# Altium PCB UDEMY_ALI_ALCAN.PcbDoc (part 3 of 3)
Units mm, origin at the board's own origin, x right, y up, seen from the top; angles counter-clockwise.
Board outline 102 x 100 mm, 4 copper layers (Top Layer, GROUND, POWER, Bottom Layer), stack 1.369 mm thick; 127 components, 90 nets, 438 pads, 96 vias.
Unrouted connection lines stored in the file: 1.
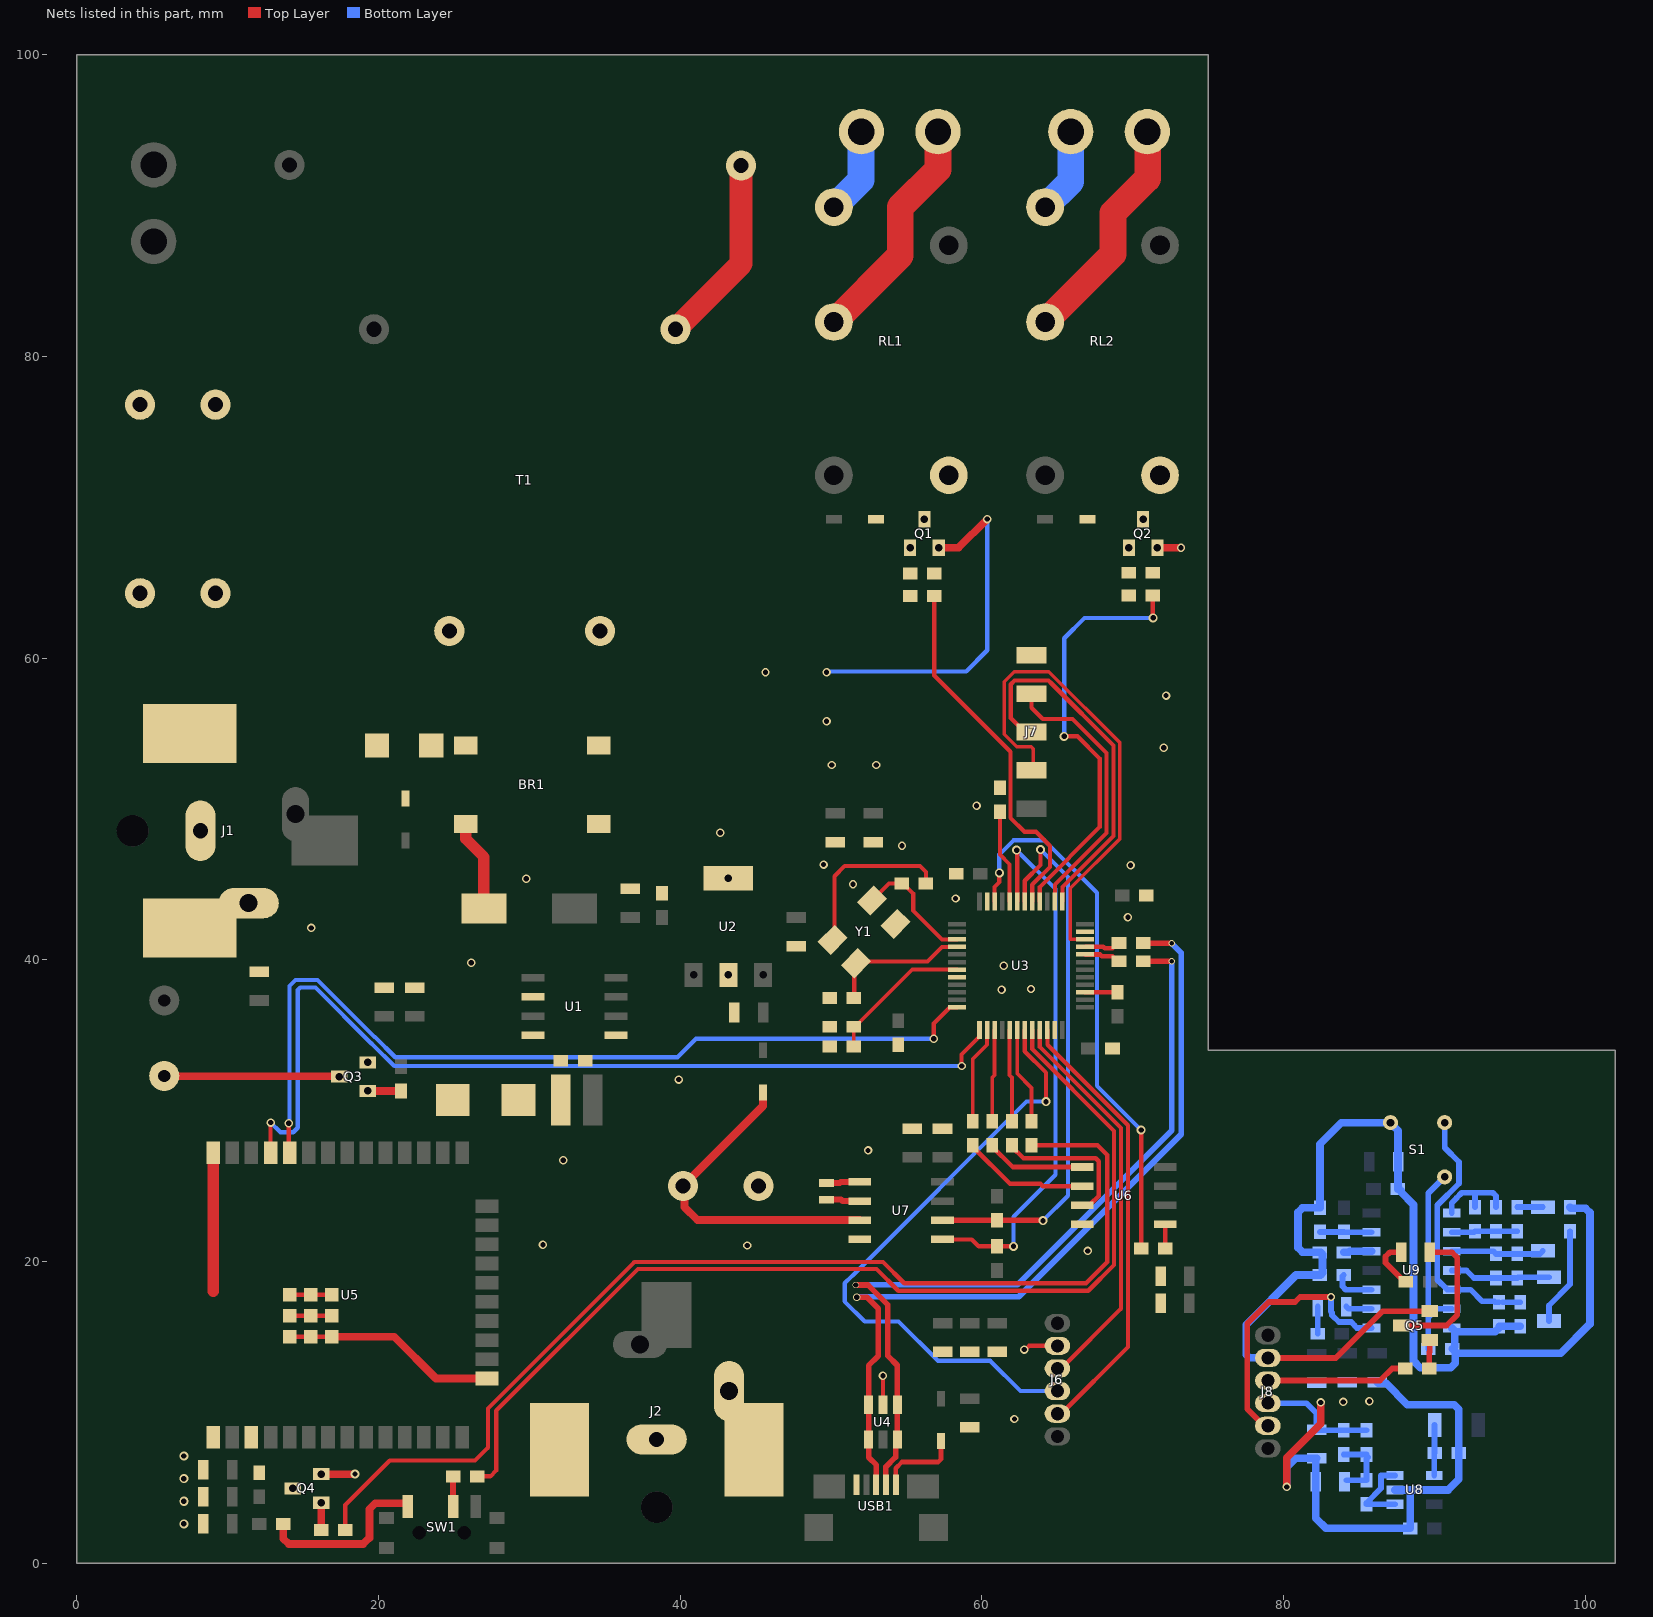
[diagram p4: the nets of this part, all layers, seen from the top]

## Via types
v1: diameter 0.559, hole 0.35, Top Layer to Bottom Layer, 48 vias
v2: diameter 0.6, hole 0.35, Top Layer to Bottom Layer, 42 vias
v3: diameter 0.45, hole 0.3, Top Layer to Bottom Layer, 2 vias
v4: diameter 0.5, hole 0.35, Top Layer to Bottom Layer, 1 vias
v5: diameter 0.4, hole 0.35, Top Layer to Bottom Layer, 1 vias
v6: diameter 0.5, hole 0.3, Top Layer to Bottom Layer, tented both sides, 1 vias
v7: diameter 0.35, hole 0.35, Top Layer to Bottom Layer, 1 vias

## Nets (pads, with @x,y where several pads share a name; then routed paths per layer and width w, separated by ;. In a path a pad name is that pad's centre, name@x,y a point inside that pad or via, vN(x,y) a via of type N, cw(c..) or ccw(c..) an arc to the next point about the centre after c; other vN are vias at no path point) (continued)
GND: BR1.4 C1.@22.4,38.15 C2.@20.4,38.15 C3.@36.7,44.7 C4.1 C6.@47.7,40.9 C7.@43.6,36.5 C8.2 C9.2 C10.2 C11.@59.2,9 C12.@57.416,14.004 C13.@59.216,14.004 C14.@61.016,14.004 C15.1 C17.1 C18.@12.1,39.2 C19.@8.4,2.6 C20.@8.4,4.4 C21.@8.4,6.2 C22.2 C23.@71.862,17.222 C24.@55.4,28.8 C25.@71.862,19.022 C26.@57.4,28.8 C27.@50.3,47.8 C28.@52.8,47.8 C29.1 C30.1 C31.1 C32.1 D1.A J1.2 J1.3 J2.2 J2.3 J6.2 J7.5 Q1.2 Q2.2 Q3.2 Q4.2 R3.1 R5.1 R6.1 R8.1 U1.6 U2.2 U3.8 U3.23 U3.35 U3.47 U4.2 U5.1 U5.15 U5.38 U5.39 U6.4 U7.4 USB1.5 Y1.2 | length 67.1
  Top Layer w0.279: U4.2@53.45,10.5 v1(53.45,12.414) ; v1(62.816,14.154) 62.891,14.154 63.142,14.404 J6.2@65.016,14.404 ; v1(73.211,67.31) v1@73.218,67.317
  Top Layer w0.305: U5.39@14.119,14.998 U5.39@15.519,14.998 U5.39@16.919,14.998 ; U5.39@14.119,16.398 U5.39@15.519,16.398 U5.39@16.919,16.398 ; U5.39@14.119,17.798 U5.39@15.519,17.798 U5.39@16.919,17.798 ; v2(18.453,5.9) v2@18.455,5.901
  Top Layer w0.5: Q1.2@57.15,67.31 58.458,67.31 v1(60.365,69.217) ; Q2.2@71.65,67.31 v1(73.211,67.31)
  Top Layer w0.508: Q4.2@16.2,5.9 v2(18.453,5.9) ; U5.39@16.919,14.998 21.061,14.998 23.819,12.24 U5.15@27.2,12.24
  Top Layer w0.762: 9.039,18.036 U5.38@9.039,27.198 ; BR1.4@25.8,48.99 25.8,48.009 27,46.809 C8.2@27,43.4
  Bottom Layer w0.279: v1(49.713,59.065) 49.766,59.118 58.968,59.118 60.365,60.515 v1(60.365,69.217)
  other v1: 62.166,9.552 67.028,20.695 44.461,21.055 30.908,21.105 32.258,26.707 52.463,27.357 39.91,32.058 61.315,38.01 63.266,38.06 61.465,39.61 26.157,39.81 15.554,42.111 69.692,42.814 58.265,44.061 51.463,45.011 29.808,45.361 69.868,46.262 49.512,46.312 54.714,47.562 42.661,48.412 59.655,50.214 50.063,52.913 53.004,52.912 72.068,54.064 49.713,55.814 72.218,57.514 45.662,59.065
  other v2: 7.1,2.6 7.1,4.1 7.1,5.6 7.1,7.1
GND_S: C33.@82.218,11.95 C34.@84.219,12 C35.@86.219,12 C39.1 C41.1 C42.@82.15,5.4 C43.1 C44.@82.2,6.95 C45.1 C46.1 C47.@87.6,26.6 J8.2 Q5.2 R24.1 R25.1 R29.1 R32.1 R33.1 S1.1 U8.2 U9.7 | length 122.2
  Top Layer w0.381: J8.2@78.97,13.603 83.47,13.603 86.568,16.7 Q5.2@89.7,16.7
  Top Layer w0.508: v1(80.22,5.051) 80.22,6.977 82.471,9.227 v1(82.471,10.653)
  Bottom Layer w0.508: J8.2@78.97,13.603 77.752,13.603 77.537,13.818 77.537,15.804 80.833,19.1 82.456,19.1 82.596,19.24 82.596,20.46 82.456,20.6 81.268,20.6 80.97,20.898 80.97,23.258 81.268,23.556 C45.1@82.421,23.556 82.421,27.776 83.845,29.2 S1.1@87.1,29.2 87.233,29.2 87.233,29.023 87.6,28.656 C46.1@87.6,24.834 ; v1(80.22,5.051) 80.22,6.352 80.819,6.95 C44.@82.2,6.95 82.15,6.9 C42.@82.15,5.4 82.15,2.971 82.821,2.3 C43.1@88.4,2.3 88.4,4.85 ; C35.@86.219,12 86.307,11.912 86.813,11.912 88.222,10.503 91.325,10.503 91.623,10.205 91.623,5.551 90.922,4.85 88.4,4.85 ; U8.2@87.4,4.85 88.4,4.85 ; C46.1@87.6,24.778 C46.1@87.6,24.807 ; C46.1@87.66,24.807 87.801,24.667 87.801,24.58 88.622,23.758 88.622,13.415 89.084,12.953 91.098,12.953 91.396,13.251 C39.1@91.396,14.004 ; U9.7@91.16,15.59 91.417,15.333 94.022,15.333 94.3,15.611 R29.1@94.3,15.7 C41.1@95.7,15.7 ; U9.7@91.369,15.305 91.369,14.34 91.229,14.2 C39.1@91.2,14.2 C39.1@91.396,14.004 ; R24.1@99,23.6 99.064,23.536 100.024,23.536 100.321,23.239 100.321,15.85 98.386,13.915 91.485,13.915 C39.1@91.396,14.004
  other v1: 83.966,10.683 85.7,10.722
LED_DRIVER: J6.3 U3.21 | length 26.6
  Top Layer w0.279: U3.21@63.85,35.35 63.85,34.222 69.232,28.841 69.232,16.869 65.266,12.904 J6.3@65.016,12.904
LED_S: J8.3 R35.1 | length 9.4
  Top Layer w0.381: J8.3@78.97,12.103 86.408,12.103 87.209,12.903 R35.1@88.072,12.903
LIGHT_1_GND: J4.2 RL1.3 | length 5.8
  Bottom Layer w1.778: RL1.3@50.2,89.9 52,91.7 52,94.88 J4.2@52.02,94.9
LIGHT_1_VCC: J4.1 RL1.2 | length 15.5
  Top Layer w1.778: RL1.2@50.2,82.28 54.6,86.68 54.6,89.9 57.1,92.4 J4.1@57.1,94.9
LIGHT_2_GND: J5.2 RL2.3 | length 5.7
  Bottom Layer w1.778: RL2.3@64.2,89.9 65.9,91.6 J5.2@65.9,94.9
LIGHT_2_VCC: J5.1 RL2.2 | length 15.4
  Top Layer w1.778: RL2.2@64.2,82.28 68.7,86.78 68.7,89.5 71,91.8 71,94.88 J5.1@70.98,94.9
MCU_N: R11.1 U3.32 | length 2.5
  Top Layer w0.305: U3.32@66.85,40.35 66.85,40.337 67.063,40.337 67.076,40.35 67.837,40.35 67.944,40.243 68.668,40.243 69.011,39.9 R11.1@69.1,39.9
MCU_P: R12.1 U3.33 | length 2.4
  Top Layer w0.305: U3.33@66.863,40.863 68.05,40.863 68.157,40.757 68.668,40.757 69.011,41.1 R12.1@69.1,41.1
NetBR1_1: BR1.1 T1.9
NetBR1_2: BR1.2 T1.7
NetBR1_3: BR1.3 F1.1
NetBZ1_1: BZ1.1 Q3.3 | length 11.6
  Top Layer w0.508: BZ1.1@5.8,32.3 5.825,32.275 17.385,32.275 Q3.3@17.41,32.25
NetC5_1: C5.1 U1.1
NetC5_2: C5.2 D1.C L1.1 U1.8
NetC9_1: C9.1 C10.1 D2.2 F1.2
NetC16_1: C16.1 Y1.4 | length 11.5
  Top Layer w0.279: Y1.4@50.114,41.319 50.238,41.443 50.238,45.537 50.913,46.212 55.914,46.212 56.3,45.826 C16.1@56.3,45.05
NetC16_2: C16.2 U3.3 Y1.3 | length 8.3
  Top Layer w0.279: Y1.3@52.73,43.936 53.844,45.05 C16.2@54.7,45.05 54.789,45.05 55.452,44.387 55.452,43.267 57.369,41.35 U3.3@58.35,41.35
NetC17_2: C17.2 U3.4 Y1.1 | length 9.5
  Top Layer w0.279: C17.2@51.513,37.459 51.546,37.492 51.546,39.64 Y1.1@51.67,39.764 51.793,39.887 56.406,39.887 57.369,40.85 U3.4@58.35,40.85
NetC22_1: C22.1 D6.1 U7.3 | length 21.8
  Top Layer w0.533: D6.1@45.5,31.2 45.5,30.3 C22.1@40.2,25 40.281,24.919 40.281,23.619 41.167,22.733 U7.3@51.9,22.733
NetC23: 
NetC36_1: C36.1 R24.2 | length 6.5
  Bottom Layer w0.381: C36.1@97.6,16.05 97.6,17.08 99,18.48 R24.2@99,22
NetC36_2: C36.2 C38.1 R23.1 U9.4 | length 6.7
  Bottom Layer w0.381: U9.4@91.16,19.4 92.131,19.4 92.631,18.9 C38.1@94.1,18.9 R23.1@95.5,18.9 95.55,18.95 C36.2@97.6,18.95
NetC37_1: C37.1 C38.2 R23.2 U9.3 | length 6.2
  Bottom Layer w0.381: U9.3@91.16,20.67 93.93,20.67 C38.2@94.1,20.5 97,20.5 C37.1@97.2,20.7
NetC37_2: C37.2 R26.1 | length 1.7
  Bottom Layer w0.381: R26.1@95.5,23.6 C37.2@97.2,23.6
NetC39_2: C39.2 S1.3 U9.6 | length 13.6
  Bottom Layer w0.381: C39.2@89.6,14.2 89.6,24.516 S1.3@90.692,25.608 ; 89.623,16.304 90.178,16.86 U9.6@91.16,16.86
NetC40_1: C40.1 R26.2 R27.1 U9.2 | length 4.4
  Bottom Layer w0.381: U9.2@91.16,21.94 92.64,21.94 C40.1@92.7,22 R27.1@94.1,22 R26.2@95.5,22
NetC40_2: C40.2 R27.2 U9.1 | length 5.7
  Bottom Layer w0.381: U9.1@91.16,23.21 91.16,23.881 91.473,24.194 91.473,24.206 91.823,24.556 92.608,24.556 ; C40.2@92.7,23.6 92.7,24.464 92.608,24.556 ; R27.2@94.1,23.6 94.1,24.333 93.877,24.556 92.608,24.556
NetC41_2: C41.2 R29.2 S1.2 U9.5 | length 17.3
  Bottom Layer w0.381: S1.2@90.692,29.2 90.692,27.532 91.637,26.588 91.637,25.16 90.202,23.725 90.202,18.788 90.86,18.13 U9.5@91.16,18.13 92.398,18.13 93.173,17.354 93.969,17.354 94.024,17.3 R29.2@94.3,17.3 ; R29.2@94.524,17.3 C41.2@95.7,17.3
NetC42: C42.@84.05,5.4 R28.2 R30.1 R31.1 | length 4.4
  Bottom Layer w0.381: R30.1@84,7.2 R31.1@85.5,7.2 ; C42.@84.177,5.5 R28.2@85.5,5.5 85.5,6.908 R31.1@85.61,7.018
NetC45_2: C45.2 R36.1 U9.13 | length 3.4
  Bottom Layer w0.381: C45.2@82.421,21.956 R36.1@84.021,21.956 84.037,21.94 U9.13@85.84,21.94
NetD3_2: D3.2 USB1.1 | length 5.6
  Top Layer w0.305: USB1.1@54.3,5.2 54.3,6.288 54.714,6.702 57.121,6.702 57.3,6.88 D3.2@57.3,8.1
NetD4_2: D4.2 Q1.3 RL1.4
NetD5_2: D5.2 Q2.3 RL2.4
NetD7_1: D7.1 U9.9 | length 1.7
  Bottom Layer w0.381: D7.1@84.171,17.004 84.315,16.86 U9.9@85.84,16.86
NetD7_2: D7.2 R34.1 | length 1.8
  Bottom Layer w0.381: R34.1@82.271,15.204 82.271,15.979 D7.2@82.271,17.004
NetD8_1: D8.1 Q5.3 | length 9.8
  Top Layer w0.381: Q5.3@87.81,15.75 90.819,15.75 91.523,16.454 91.523,20.255 91.178,20.6 D8.1@89.7,20.6
NetD8_2: D8.2 R37.1 | length 3.4
  Top Layer w0.381: D8.2@87.8,20.6 87.069,20.6 87.024,20.555 86.995,20.555 86.772,20.332 86.772,19.916 88.033,18.655 R37.1@88.122,18.655
NetJ6_5: J6.5 U3.22 | length 29.7
  Top Layer w0.279: U3.22@64.35,35.35 64.35,34.369 69.689,29.03 69.689,14.326 65.266,9.904 J6.5@65.016,9.904
NetJ8_5: J8.5 U9.8 | length 18
  Top Layer w0.381: J8.5@78.97,9.103 78.72,9.103 77.601,10.222 77.601,15.878 79.027,17.304 80.77,17.304 81.108,17.642 v1(83.154,17.642)
  Bottom Layer w0.381: v1(83.154,17.642) 83.154,16.672 83.226,16.6 83.226,16.428 83.678,15.976 84.496,15.976 84.722,15.75 84.722,15.737 84.869,15.59 U9.8@85.84,15.59
NetQ1_1: Q1.1 R2.2 R3.2
NetQ2_1: Q2.1 R4.2 R5.2
NetQ3_1: Q3.1 R7.2 | length 2.2
  Top Layer w0.508: Q3.1@19.3,31.3 20.725,31.3 R7.2@21.5,31.3
NetQ4_1: Q4.1 R14.2 | length 1.8
  Top Layer w0.508: R14.2@16.2,2.2 16.2,2.975 Q4.1@16.2,4
NetQ5_1: Q5.1 R35.2 | length 1.9
  Top Layer w0.381: R35.2@89.673,12.903 89.673,13.992 89.7,14.019 Q5.1@89.7,14.8
NetR1_2: R1.2 T1.1 | length 12.6
  Top Layer w1.524: T1.1@39.7,81.8 44.047,86.147 R1.2@44.047,92.649
NetR2_1: R2.1 U3.41 | length 24.4
  Top Layer w0.279: R2.1@56.85,64.11 56.85,58.85 61.911,53.789 61.911,49.41 62.838,48.483 63.59,48.483 64.517,47.556 64.517,46.145 63.35,44.978 U3.41@63.35,43.85
NetR4_1: R4.1 U3.40 | length 28.6
  Top Layer w0.279: U3.40@63.85,43.85 63.85,44.831 67.817,48.798 67.817,53.35 66.353,54.814 v2(65.466,54.814) ; v2@71.35,62.684 v2(71.368,62.666)
  Top Layer w0.3: v2@71.35,62.684 R4.1@71.35,64.155
  Bottom Layer w0.279: v2(65.466,54.814) 65.466,61.315 66.817,62.666 v2(71.368,62.666)
NetR8_2: R8.2 U3.44 | length 6.2
  Top Layer w0.254: R8.2@61.2,49.8 61.2,46.982 61.85,46.332 U3.44@61.85,43.85
NetR15_1: R15.1 U3.18 | length 6.4
  Top Layer w0.254: U3.18@62.35,35.35 62.35,32.452 63.3,31.502 R15.1@63.3,29.3
NetR16_1: R16.1 U3.27 | length 2.1
  Top Layer w0.279: U3.27@66.85,37.85 R16.1@69,37.85
NetR17_2: R17.2 SW1.2 | length 2
  Top Layer w0.279: R17.2@24.95,5.745 R17.2@24.956,5.751
  Top Layer w0.4: SW1.2@24.95,3.75 R17.2@24.95,5.745
NetR18_1: R18.1 U6.1 | length 6.6
  Top Layer w0.305: R18.1@60.7,27.7 60.7,27.611 62.05,26.261 U6.1@66.667,26.261
NetR19_1: R19.1 U6.3 | length 9.9
  Top Layer w0.305: R19.1@62,27.7 62,27.611 62.77,26.841 67.554,26.841 67.748,26.648 67.748,24.337 67.265,23.854 67.265,23.819 67.167,23.721 U6.3@66.667,23.721
NetR20_1: R20.1 U6.2 | length 8.4
  Top Layer w0.305: R20.1@59.4,27.7 59.4,27.611 61.871,25.14 63.896,25.14 64.045,24.991 U6.2@66.667,24.991
NetR21_1: R21.1 U6.5 | length 1.6
  Top Layer w0.279: R21.1@72.168,20.855 72.168,21.82 U6.5@72.167,22.451
NetR22_1: R22.1 SW1.1 | length 11.8
  Top Layer w0.508: R22.1@13.7,2.6 13.7,1.623 14.054,1.269 19.005,1.269 19.404,1.668 19.404,3.569 19.804,3.969 21.854,3.969 21.95,3.873 SW1.1@21.95,3.75
NetR25_2: R25.2 RT1.1 U8.4 | length 3.3
  Bottom Layer w0.381: U8.4@90,5.8 R25.2@90,7.279 ; R25.2@90.023,7.302 RT1.1@90.023,9.152
NetR28_1: R28.1 U8.1 U8.3 | length 5.1
  Bottom Layer w0.381: U8.1@87.4,3.9 86.469,3.9 R28.1@85.5,3.9 85.5,3.989 86.469,4.958 86.469,5.8 U8.3@87.4,5.8
NetR32_2: R32.2 U9.12 | length 1.9
  Bottom Layer w0.508: R32.2@84,20.6 84.321,20.6 84.391,20.67 U9.12@85.84,20.67
NetR33_2: R33.2 U9.10 | length 2.8
  Bottom Layer w0.381: R33.2@84,19.1 83.911,19.011 83.911,18.35 84.134,18.126 U9.10@85.84,18.126
NetU7_1: U7.1 Y2.2 | length 2.2
  Top Layer w0.381: Y2.2@49.7,25.2 50.581,25.2 50.654,25.273 U7.1@51.9,25.273
NetU7_2: U7.2 Y2.1 | length 2.2
  Top Layer w0.381: Y2.1@49.7,24.1 50.672,24.1 50.769,24.003 U7.2@51.9,24.003
NRST: C15.2 R6.2 U3.7 | length 9.6
  Top Layer w0.254: C15.2@51.513,34.259 R6.2@51.513,35.559 ; R6.2@51.602,35.559 55.393,39.35 U3.7@58.35,39.35
RTC_SCL: R9.1 U3.42 U7.6 | length 36.6
  Top Layer w0.279: U3.42@62.85,43.85 62.85,45.237 63.9,46.287 v2(63.9,47.3)
  Top Layer w0.381: U7.6@57.4,22.733 v2@64.039,22.733
  Bottom Layer w0.279: v2(63.9,47.3) 65.717,45.483 65.717,24.356 v2(64.066,22.706)
RTC_SDA: R10.1 U3.43 U7.5 | length 36.8
  Top Layer w0.279: U7.5@57.4,21.463 59.337,21.463 59.8,21 R10.1@61,21 v2(62.1,21) ; v2(62.316,47.262) 62.35,47.228 U3.43@62.35,43.85 U3.43@62.355,43.855
  Bottom Layer w0.279: v2(62.1,21) 62.1,22.963 64.884,25.747 64.884,44.694 v2(62.316,47.262)
SENSOR_ONOFF: R17.1 U3.20 | length 69.4
  Top Layer w0.279: R17.1@26.557,5.751 27.42,5.751 27.807,6.138 27.807,10.103 37.209,19.505 53.013,19.505 54.464,18.055 67.063,18.055 68.774,19.766 68.774,28.651 63.35,34.076 U3.20@63.35,35.35
SWCLK: J7.3 U3.37 | length 24.4
  Top Layer w0.279: J7.3@63.3,55.1 62.85,55.1 61.919,56.031 61.919,58.258 61.994,58.333 62.168,58.508 64.432,58.508 64.606,58.333 68.731,54.208 68.731,48.212 65.35,44.831 U3.37@65.35,43.85
SWDIO: J7.2 U3.34 | length 32.6
  Top Layer w0.229: J7.2@63.3,52.56 63.407,52.667 63.407,53.975 63.273,54.109 62.328,54.109 61.487,54.95 61.487,58.437 62.15,59.1 64.45,59.1 69.163,54.386 69.163,48.034 65.869,44.739 65.869,41.35 U3.34@66.85,41.35
TDI: J7.4 U3.38 | length 18.4
  Top Layer w0.279: J7.4@63.3,57.64 63.3,56.709 64.042,55.968 66.01,55.968 68.274,53.703 68.274,48.402 64.85,44.978 U3.38@64.85,43.85
TEMP_ADC: C44.@82.2,8.85 J8.4 R30.2 R31.2 | length 7.9
  Bottom Layer w0.381: J8.4@78.97,10.603 81.528,10.603 82.2,9.931 C44.@82.2,8.85 82.25,8.8 R30.2@84,8.8 R31.2@85.5,8.8
TEMP_IN_CS: R20.2 U3.14 | length 6.4
  Top Layer w0.254: R20.2@59.4,29.3 59.4,33.419 60.35,34.369 U3.14@60.35,35.35
TEMP_IN_OT: R21.2 U3.46 | length 36.4
  Top Layer w0.279: U3.46@60.85,43.85 60.85,44.831 61.165,45.146 v2(61.165,45.762) ; v2@70.518,28.757 v2(70.568,28.707) R21.2@70.568,20.855
  Bottom Layer w0.279: v2(61.165,45.762) 61.165,46.985 62.098,47.917 64.156,47.917 67.634,44.439 67.634,31.641 v2(70.568,28.707)
TEMP_IN_SCLK: R18.2 U3.15 | length 6.1
  Top Layer w0.254: R18.2@60.7,29.3 60.7,32.191 60.85,32.341 U3.15@60.85,35.35
TEMP_IN_SIO: R19.2 U3.17 | length 6.1
  Top Layer w0.254: U3.17@61.85,35.35 61.85,32.341 62,32.191 R19.2@62,29.3
TEMPARATURE_ADC: J6.4 U3.19 | length 41.4
  Top Layer w0.279: U3.19@62.85,35.35 62.85,33.929 64.266,32.513 v2(64.266,30.595)
  Bottom Layer w0.279: v2(64.266,30.595) 62.974,30.595 51.414,19.035 51.399,19.035 50.913,18.549 50.913,17.354 52.247,16.02 54.488,16.02 57.096,13.412 60.557,13.412 62.565,11.404 J6.4@65.016,11.404
USB_N: R11.2 U4.1 U4.6 USB1.2 | length 53.5
  Top Layer w0.373: v5(51.646,18.438) 52.461,18.438 53.764,17.136 53.764,13.753 54.4,13.117 U4.1@54.4,10.5 U4.6@54.4,8.2 54.287,8.087 54.287,7.025 53.639,6.377 53.639,5.211 USB1.2@53.65,5.2 ; R11.2@70.7,39.9 v3(72.6,39.9)
  Bottom Layer w0.373: v5@51.646,18.455 62.366,18.455 72.6,28.689 v3(72.6,39.9)
USB_P: R12.2 U4.3 U4.4 USB1.3 | length 54.7
  Top Layer w0.373: v4(51.708,17.628) 52.384,17.628 53.136,16.876 53.136,13.726 52.5,13.09 U4.3@52.5,10.5 U4.4@52.5,8.2 52.5,7.015 53.011,6.504 53.011,5.211 USB1.3@53,5.2 ; R12.2@70.7,41.1 v3@72.579,41.1
  Bottom Layer w0.373: v4(51.708,17.628) 51.735,17.654 62.453,17.654 73.227,28.429 73.227,40.458 v3@72.6,41.085
  other v3: 72.6,41.1
WIFI_EN: R14.1 R15.2 | length 73.9
  Top Layer w0.279: R14.1@17.8,2.2 17.8,3.846 20.755,6.802 26.407,6.802 27.257,7.652 27.257,10.253 36.966,19.962 53.456,19.962 54.864,18.555 66.917,18.555 68.317,19.955 68.317,27.057 67.674,27.7 R15.2@63.3,27.7
WIFI_OUT: Q4.3 R13.1 U5.3
WIFI_RXD: U3.12 U5.34 | length 59.6
  Top Layer w0.279: v1(14.057,29.157) 14.057,27.26 U5.34@14.119,27.198 ; v1(56.814,34.759) 56.814,35.764 57.9,36.85 U3.12@58.35,36.85
  Bottom Layer w0.279: v1(14.057,29.157) 14.104,29.204 14.104,38.26 14.504,38.66 15.967,38.66 19.744,34.883 19.771,34.883 21.115,33.538 39.831,33.538 41.052,34.759 v1(56.814,34.759)
WIFI_TXD: U3.13 U5.35 | length 62.5
  Top Layer w0.279: U5.35@12.849,27.198 12.849,29.203 v1(12.853,29.207) ; v1(58.665,32.958) 58.665,33.715 59.85,34.9 U3.13@59.85,35.35
  Bottom Layer w0.279: v1(12.853,29.207) 13.5,28.56 14.351,28.56 14.654,28.863 14.654,37.996 14.817,38.16 15.821,38.16 19.555,34.425 19.581,34.425 21.048,32.958 v1(58.665,32.958)
pads on no net: J1. J2. J6.6 J8.6 RL1.1 RL2.1 SW1. SW1.3 SW1.6 U1.2 U1.3 U1.5 U3.1 U3.2 U3.5 U3.6 U3.10 U3.11 U3.16 U3.25 U3.26 U3.28 U3.29 U3.30 U3.31 U3.39 U3.45 U5.4 U5.5 U5.6 U5.7 U5.8 U5.9 U5.10 U5.11 U5.12 U5.13 U5.14 U5.16 U5.17 U5.18 U5.19 U5.20 U5.21 U5.22 U5.23 U5.24 U5.25 U5.26 U5.27 U5.28 U5.29 U5.30 U5.31 U5.32 U5.33 U5.36 U5.37 U6.6 U6.7 U7.7 U9.11 USB1. USB1.4

## Polygon pours and split planes (outlines as drawn)
GND on Top Layer "GND_L01_P022" (solid, remove dead copper, pour order 22): 6.202,78.52 2.501,78.52 1.8,77.82 1.8,29.908 3.151,28.557 27.557,28.557 29.007,27.107 29.007,3.251 31.308,0.95 72.568,0.95 74.469,2.851 74.469,60.665 73.268,61.866 41.41,61.866 39.61,60.065 39.61,48.262 39.56,48.262 37.71,46.412 23.656,46.412 23.656,48.012 22.656,49.012 20.805,49.012 6.852,62.966 6.852,77.87
GND_S on Top Layer "GND_S_L01_P025" (solid, remove dead copper, pour order 25): 100.525,33.058 77.72,33.058 76.719,32.058 76.719,1.8 77.57,0.95 100.575,0.95 101.326,1.7 101.326,32.258
NetBR1_2 on Top Layer "NETBR1_2_L01_P000" (solid, pour order 0): 26.457,63.466 25.885,63.466 23.456,63.466 23.106,63.116 23.106,60.565 23.456,60.215 25.68,60.215 32.158,53.013 33.19,53.013 35.859,53.013 36.009,53.163 36.009,55.264 35.859,55.414 33.394,55.414
"5V DC" on Top Layer "Top Layer-5V DC" (solid, pour order 9): 37.88,41.996 39.696,40.181 39.696,37.981 39.896,37.781 41.796,37.781 41.996,37.981 41.996,42.476 41.168,43.303 35.625,43.318 35.309,43.572 35.309,44.667 34.98,44.996 31.206,44.996 31.006,44.796 31.006,42.096 31.206,41.896 33.506,39.396 34.706,38.096 37.106,38.096 37.406,37.796 37.406,32.796 37.006,32.396 33.596,32.396 33.406,32.206 33.406,29.059 33.57,28.896 34.906,28.896 37.806,28.896 38.406,29.496 38.406,37.854 36.296,40.081 35.243,41.133 35.243,41.569 35.606,41.996 36.106,41.996
GND on Top Layer "Top Layer-GND" (solid, pour order 21): 10.003,13.954 17.754,13.954 18.055,14.254 18.055,18.405 17.604,18.855 6.852,18.855 6.352,18.355 6.352,1.348 6.7,1 9.3,1 9.602,1.302 9.602,13.553
"3V3 DC" on Top Layer "3V3_DC_L01_P017" (solid, pour order 17): 44.911,33.008 46.112,33.008 46.462,33.358 46.462,41.51 47.212,42.261 48.312,42.261 48.612,42.561 48.612,48.262 49.062,48.712 56.838,48.712 59.165,46.385 59.165,45.261 59.565,44.861 59.565,43.085 59.668,42.982 59.982,42.982 60.115,43.115 60.115,44.861 60.565,45.311 60.565,47.585 57.487,50.663 46.662,50.663 46.362,50.363 46.362,44.961 44.561,43.161 44.561,33.358
NetC9_1 on Top Layer "NETC9_1_L01_P004" (solid, pour order 4): 10.9,65.9 10.9,77.972 10.372,78.5 8.4,78.5 7.982,78.5 7.4,77.918 7.4,77.5 7.4,63.5 7.4,63.218 8.118,62.5 8.4,62.5 10.9,62.5 15.42,62.5 18.4,59.52 18.4,55 18.4,52.7 18.7,52.4 20.218,52.4 20.5,52.118 20.5,49.768 20.755,49.512 22.706,49.512 23,49.807 23,52.269 22.669,52.6 21.819,52.6 21.5,52.919 21.5,55.3 21.5,55.7 21.5,60.171 16.371,65.3 11.5,65.3
NetBR1_1 on Top Layer "NETBR1_1_L01_P001" (solid, pour order 1): 33.542,63.55 33.1,63.108 33.1,60.674 33.574,60.2 36.374,60.2 36.597,59.978 36.597,50.55 36.346,50.3 33.62,50.3 33.2,49.918 33.2,48.045 33.538,47.8 38.198,47.8 38.5,48.102 38.5,62.9 38.5,63.126 38.076,63.55
GND_S on Bottom Layer "GND_S_L04_P024" (solid, remove dead copper, pour order 24): 77.47,33.108 100.275,33.108 101.276,32.108 101.276,1.85 100.425,1 77.42,1 76.669,1.75 76.669,32.308
GND on Bottom Layer "GND_L04_P023" (solid, pour order 23): 71.401,59.265 70.201,58.065 70.201,55.314 68.701,53.814 6.285,53.814 4.134,51.663 4.134,29.307 5.385,28.057 29.141,28.057 29.691,27.507 29.691,6.852 30.841,5.701 74.102,5.701 75.002,6.602 75.002,58.415 74.152,59.265 73.102,59.265 74.152,59.265 73.102,59.265
"3V3 DC" on POWER (split plane): 13.003,57.514 46.812,57.514 46.812,75.219 74.49,75.219 74.49,34 74.499,33.9 74.528,33.805 74.558,33.748 74.558,0.51 0.51,0.51 0.51,4.951 8.502,4.951 8.502,28.007 0.51,28.007 0.51,80.17 13.003,80.17
"12V DC" on POWER (split plane): 66.218,73.283 66.218,63.717 64.583,62.082 48.4,62.082 48.327,62.072 48.259,62.044 48.201,61.999 48.156,61.941 48.128,61.873 48.118,61.8 48.118,54.218 44.582,50.682 22.2,50.682 22.127,50.672 22.059,50.644 22.001,50.599 20.201,48.799 20.156,48.741 20.128,48.673 20.118,48.6 20.118,45.6 20.128,45.527 20.148,45.479 20.156,45.459 20.201,45.401 20.301,45.301 20.359,45.256 20.398,45.24 25.344,40.294 25.344,37.006 23.894,35.556 16.206,35.556 14.656,37.106 14.656,44.8 14.647,44.866 14.64,44.884 14.622,44.928 14.581,44.981 12.656,46.906 12.656,52.694 12.881,52.919 13.106,53.144 20.613,53.144 22.246,51.511 22.262,51.472 22.306,51.414 22.365,51.369 22.433,51.341 22.506,51.331 44.111,51.331 44.184,51.341 44.232,51.361 44.252,51.369 44.31,51.414 47.599,54.703 47.644,54.761 47.672,54.829 47.682,54.902 47.682,71.4 47.682,73.283 48.617,74.218 51.383,74.218 52.618,72.983 52.618,65.6 52.628,65.527 52.648,65.479 52.656,65.459 52.701,65.401 53.801,64.301 53.834,64.275 53.859,64.256 53.927,64.228 54,64.218 60.4,64.218 60.473,64.228 60.521,64.248 60.541,64.256 60.599,64.301 61.899,65.601 61.944,65.659 61.972,65.727 61.982,65.8 61.982,72.983 63.217,74.218 65.283,74.218
"3V3 DC_S" on POWER (split plane): 101.49,0.51 76.33,0.51 76.33,0.775 76.33,33.49 101.49,33.49
"5V DC" on POWER (split plane): 38.354,32.002 38.354,16.554 38.362,16.488 38.388,16.426 38.429,16.373 39.454,15.348 39.454,13.61 38.804,12.959 36.215,12.959 35.515,13.66 35.515,28.257 35.506,28.323 35.488,28.367 35.481,28.385 35.44,28.438 34.615,29.263 34.615,32.052 35.165,32.602 37.753,32.602
GND on GROUND (split plane): 13.003,58.165 44.611,58.165 44.611,75.219 74.49,75.219 74.49,34.055 74.482,33.959 74.482,0.51 0.51,0.51 0.51,8.152 8.102,8.152 8.102,28.007 0.51,28.007 0.51,80.17 13.003,80.17
GND_S on GROUND (split plane): 101.49,0.51 76.203,0.51 76.206,0.55 76.206,33.49 101.49,33.49

## Keep-outs
Top Layer:
  circle w0.254: c71.936,31.571 r1.5
Keep-Out Layer:
  the board outline again, w0.254

## Other copper
Top Layer:
  region: 72.046,32.254 71.846,32.254 ccw(c71.846,31.654) 71.246,31.654 ccw(c71.846,31.654) 71.846,31.054 72.046,31.054 ccw(c72.046,31.554) 72.546,31.554 72.546,31.754 ccw(c72.046,31.754)
  pour cut-out: 12.335,29.207 cw(c12.853,29.207) 12.853,29.725 13.012,29.725
  pour cut-out: 14.212,29.725 cw(c14.212,29.316) 14.622,29.316 14.622,29.157
  pour cut-out: 54.288,43.625 53.919,43.994 53.924,43.994 53.989,44.059 54.188,43.86 54.257,43.86 54.257,43.789 54.348,43.698
  pour cut-out: 53.989,44.059 53.687,44.361 53.912,44.587 53.965,44.534 54.039,44.534 54.039,44.478 54.829,44.478 55.078,44.229 55.078,43.258 55.024,43.258 54.961,43.195 54.41,43.747 54.302,43.747 54.348,43.701 54.348,43.698 54.361,43.698 54.41,43.747
  pour cut-out: 80.18,7.632 80.134,7.678 80.046,7.678 80.046,7.934 79.704,8.275 79.704,8.564 80.027,8.887 79.944,8.97 79.944,9.536 79.704,9.775 79.704,10.064 80.027,10.387 80.027,10.819 80.021,10.819 79.848,10.992 79.848,11.227 80.101,11.48 80.101,11.676 80.11,11.667 80.232,11.667 80.18,11.615
  pour cut-out: 86.408,11.676 86.756,11.676 87.412,12.332 87.369,12.375 87.285,12.375 86.618,11.708 86.441,11.708
  pour cut-out: 80.101,12.53 80.048,12.583 80.048,13.122 80.101,13.176 83.601,13.176 86.699,16.273 87.082,16.273 87.082,15.172 88.538,15.172 88.538,15.323 88.972,15.323 88.972,14.222 89.194,14.222 89.194,14.168 89.266,14.095 89.266,13.495 89.245,13.475 89.012,13.475 89.012,12.332 88.733,12.332 88.733,13.475 87.412,13.475 87.412,13.331 87.379,13.298 87.018,13.298 86.25,12.53
  region net LED_S: 78.07,12.754 79.87,12.754 79.92,12.704 79.92,11.504 79.87,11.454 78.07,11.454 78.02,11.504 78.02,12.704
  region net GND_S: 78.07,14.254 79.87,14.254 79.92,14.204 79.92,13.004 79.87,12.954 78.07,12.954 78.02,13.004 78.02,14.204
  region net "3V3 DC_S": 78.07,15.754 79.87,15.754 79.92,15.704 79.92,14.504 79.87,14.454 78.07,14.454 78.02,14.504 78.02,15.704
  pour cut-out: 14.622,29.157 14.495,29.03 14.495,28.557 14.626,28.557 14.622,28.562
  pour cut-out: 12.853,29.725 14.212,29.725 14.241,29.697 12.882,29.697
  pour cut-out: 12.335,29.207 12.335,28.562 12.341,28.557 12.473,28.557 12.473,28.861 12.375,28.96 12.375,29.406
  pour cut-out: 14.054,29.725 14.104,29.675 13.737,29.309 13.737,28.563 13.743,28.557 13.225,28.557 13.225,28.849 13.371,28.995 13.371,29.366 13.012,29.725
  pour cut-out: 32.7,28.519 33.497,28.519 33.501,28.515 33.501,28.784 33.225,29.059 33.229,29.063 33.229,32.285 33.344,32.4 33.335,32.41 33.335,32.509 33.153,32.69 33.139,32.676 33.01,32.676 33.01,32.654 32.981,32.626 32.981,28.744 32.769,28.533
  pour cut-out: 32.7,34.181 33.325,34.181 33.1,33.956 33.09,33.965 32.977,33.965 32.828,34.114 32.828,34.128 32.809,34.128 32.756,34.181
  pour cut-out: 29.019,35.3 29.019,35.375 29.145,35.501 29.096,35.55 29.096,35.619 28.767,35.619 28.757,35.609
  pour cut-out: 23.535,34.859 24.285,35.609 24.086,35.609 24.077,35.619
  pour cut-out: 24.366,34.728 24.441,34.653 24.606,34.653
  pour cut-out: 24.4,33.617 24.244,33.773 22.87,33.773 22.706,33.608
  pour cut-out: 24.4,34.694 24.366,34.728 22.635,34.728 22.409,34.502
  pour cut-out: 19.607,35.136 19.885,34.859 23.535,34.859 23.786,35.11
  pour cut-out: 67.611,23.651 67.937,23.651 67.94,23.648 67.942,23.651 67.942,23.815 67.873,23.815 67.824,23.864 67.595,23.635 67.595,23.627
  pour cut-out: 71.24,26.689 71.939,26.689 72.003,26.753 71.243,26.753 71.241,26.754 71.24,26.753
  pour cut-out: 72.167,25.769 72.103,25.833 71.24,25.833 71.24,25.771 71.237,25.769
  pour cut-out: 49.022,25.628 50.581,25.628 50.654,25.7 50.651,25.702 49.025,25.702 49.025,25.63
  pour cut-out: 49.022,25.628 50.378,25.628 50.45,25.7 49.012,25.7 49.012,25.699
  pour cut-out: 50.769,23.575 50.672,23.672 49.022,23.672 49.022,23.58 49.021,23.579 49.024,23.575
  pour cut-out: 51.9,22.228 52.825,22.228 52.828,22.225 52.828,22.305 52.151,22.305 52.113,22.266 51.938,22.266
  pour cut-out: 52.751,23.238 52.828,23.16 52.828,23.236 52.827,23.238
  pour cut-out: 51.9,23.238 52.055,23.238 52.04,23.223 52.04,23.21 51.928,23.21
  pour cut-out: 52.751,23.238 52.828,23.16 52.132,23.16 52.055,23.238
  pour cut-out: 52.23,4.347 54.872,4.347 54.872,4.276 54.878,4.271 52.154,4.271 54.878,4.271 52.154,4.271
  pour cut-out: 54.678,4.347 54.688,4.358 54.688,5.469 54.698,5.469 54.745,5.516 54.805,5.456 54.872,5.456 54.872,4.347
  pour cut-out: 54.688,5.469 54.698,5.469 54.745,5.516 54.805,5.456 54.872,5.456 54.872,4.542 54.682,4.351 54.688,4.358
  pour cut-out: 62.572,28.36 62.729,28.36 62.729,27.717 62.618,27.717 62.572,27.67
  pour cut-out: 61.272,28.36 61.428,28.36 61.429,28.36 61.429,27.717 61.318,27.717 61.272,27.67
  pour cut-out: 59.972,27.67 59.972,28.36 60.129,28.36 60.129,27.717 60.082,27.67
  pour cut-out: 62.363,31.761 62.431,31.761 62.48,31.809 62.937,31.352 62.937,29.961 62.729,29.961 62.729,28.64 62.572,28.64 62.572,29.961 62.363,29.961 62.363,31.761 62.411,31.809 62.48,31.809
  pour cut-out: 59.763,33.269 60.37,33.876 60.439,33.876 60.487,33.828 60.487,32.453 60.337,32.303 60.337,29.961 60.129,29.961 60.129,28.64 59.972,28.64 59.972,29.961 59.763,29.961
  pour cut-out: 67.231,45.59 67.217,45.576 67.217,44.903 67.488,44.632
  pour cut-out: 51.875,34.987 52.173,34.987 52.173,34.831 52.173,34.83 51.875,34.83
  pour cut-out: 50.852,34.987 51.15,34.987 51.15,34.83 50.852,34.83 50.852,34.987
  pour cut-out: 73.218,42.111 73.719,41.61 73.719,39.36 73.368,39.01 68.467,39.01 68.017,39.46 68.017,41.761 68.367,42.111 69.718,42.111
  region net GND: 70.668,65.166 70.818,65.016 72.218,65.016 72.368,65.166 72.368,67.967 72.218,68.117 70.818,68.117 70.668,67.967 70.668,65.466
  region net GND: 56.214,65.166 56.364,65.016 57.615,65.016 57.765,65.166 57.765,67.817 57.565,68.017 56.414,68.017 56.214,67.817 56.214,65.867
  region net NetQ1_1: 54.8,68 55.7,68 55.9,67.8 55.9,63.8 55.7,63.6 54.8,63.6 54.6,63.8 54.6,67.8
  region net "3V3 DC": 56.614,17.304 65.817,17.304 66.016,17.105 66.016,15.504 65.816,15.304 56.616,15.304 56.416,15.504 56.416,17.106
  region net WIFI_OUT: 11.103,9.102 11.253,9.252 12.003,9.252 12.153,9.102 12.153,7.052 12.403,6.802 12.853,6.802 14.704,6.802 14.954,6.552 14.954,4.651 14.754,4.451 13.703,4.451 13.503,4.651 13.503,5.101 13.253,5.351 11.303,5.351 11.103,5.551
  region net "3V3 DC": 9.7,9.1 9.9,9.3 10.7,9.3 10.9,9.1 10.9,5.2 11.1,5 12.5,5 12.9,4.6 12.9,1.4 12.5,1 10,1 9.7,1.3 9.7,7
  region net NetQ2_1: 69.2,68 70.2,68 70.4,67.8 70.4,63.8 70.2,63.6 69.2,63.6 69,63.8 69,67.8
  region net NetD5_2: 66.3,70.1 66.6,70.4 69.9,70.4 70.2,70.7 70.2,73.2 70.5,73.5 73.2,73.5 73.5,73.2 73.5,68.8 73.2,68.5 66.6,68.5 66.3,68.8
  region net "12V DC": 63.147,73.7 65.435,73.7 65.7,73.435 65.7,68.851 65.449,68.6 63.133,68.6 62.9,68.833 62.9,73.453
  region net NetD4_2: 52.2,70.4 52.2,68.8 52.5,68.5 58.948,68.5 59.2,68.752 59.2,73.7 59,73.9 56.4,73.9 56.2,73.7 56.2,71 55.9,70.7 52.5,70.7
  region net "12V DC": 49.1,73.9 51.4,73.9 51.7,73.6 51.7,68.8 51.4,68.5 49.1,68.5 48.8,68.8 48.8,73.6
  region net "3V3 DC": 53.9,27.2 54.1,27.4 58.2,27.4 58.4,27.2 58.4,24.7 58.2,24.5 56.5,24.5 56.3,24.7 56.3,25.6 56,25.9 54.1,25.9 53.9,26.1
  region net NetC5_1: 33.2,33.8 33.4,34 34.7,34 34.9,34.2 34.9,35.2 35.1,35.4 36.5,35.4 36.7,35.2 36.7,34.8 36.7,32.9 36.5,32.7 33.4,32.7 33.2,32.9
  region net NetC5_2: 28,32.2 27.8,32 27.8,29.5 28,29.3 31,29.3 31,28.9 31.2,28.7 32.7,28.7 32.8,28.8 32.8,33.9 32.7,34 31.3,34 31.3,35.3 31.1,35.5 29.4,35.5 29.2,35.3 29.2,32.4 29,32.2
  region net "12V DC": 19.8,37.1 19.5,36.8 19.5,35.5 19.8,35.2 23.629,35.2 23.971,35.8 31,35.8 31.2,36 31.2,36.5 31,36.7 24,36.7 23.6,37.1
  region net "12V DC": 15.4,52.5 13.5,52.5 13,52 13,45.5 13.5,45 19,45 19.5,45.5 19.5,47.057 19.643,47.2 22.344,47.2 22.5,47.356 22.5,48.468 22.356,48.612 19.64,48.612 19.493,48.731 19.505,49.375 19.5,49.6 19,50 16,50 16,51.9
  region net NetBR1_3: 22.7,55.2 22.4,54.9 22.4,53.55 22.68,53.2 26.5,53.2 26.8,53.5 26.8,54.9 26.5,55.2
Bottom Layer:
  region net TEMP_ADC: 79.87,11.254 78.07,11.254 78.02,11.204 78.02,10.004 78.07,9.954 79.87,9.954 79.92,10.004 79.92,11.204
  region net GND_S: 78.02,14.054 78.22,14.254 79.87,14.254 81.621,12.503 87.022,12.503 87.222,12.303 87.222,10.953 87.022,10.753 81.971,10.753 79.92,12.953 78.17,12.953 78.02,13.103
  region net "3V3 DC_S": 78.02,15.604 78.17,15.754 80.02,15.754 81.371,14.404 87.172,14.404 87.272,14.304 87.272,13.503 87.172,13.403 86.822,13.403 81.12,13.403 80.07,14.454 78.17,14.454 78.02,14.604
  region net "3V3 DC_S": 86.422,22.806 86.722,23.106 86.722,25.106 86.722,27.157 86.422,27.457 83.671,27.457 83.421,27.207 83.421,23.906 83.421,23.006 83.621,22.806
  region net "5V DC": 35.3,15.5 35.5,15.7 39.5,15.7 39.8,15.4 39.8,13.5 39.6,13.3 35.5,13.3 35.3,13.5 35.3,15
  region net "5V DC": 36.8,29.3 37.1,29 37.6,29 37.9,29.3 38.4,29.3 38.7,29.6 38.7,31.7 38.4,32 35.6,32 35.4,31.8 35.4,31.2 35.4,30.2 35.4,29.5 35.6,29.3
GROUND (plane layer: these items are gaps in the copper):
  rectangle: 13.003,58.165 44.611,80.32
  rectangle: 77.77,11.953 80.17,15.054
  rectangle: 63.816,12.904 66.217,15.904
  rectangle: 0.25,8.152 8.102,28.007
  rectangle: 43.961,75.219 75.269,80.97
  rectangle: 0,80.17 75.019,99.975
  lines w1.27: 75.119,0.1 75.119,33.959 ; 75.569,0.55 75.569,33.859
POWER (plane layer: these items are gaps in the copper):
  rectangle: 13.003,57.514 46.812,80.32
  rectangle: 50.613,16.704 52.613,19.405
  rectangle: 0.15,4.951 8.502,28.007
  rectangle: 0,80.17 75.019,99.975
  rectangle: 46.212,75.219 75.269,80.97
  lines w0.508: 20.5,45.5 25.6,40.4 25.6,36.9 24,35.3 16.1,35.3 14.4,37 14.4,44.8 12.4,46.8 12.4,52.8 12.7,53.1 ; 22.506,51.613 20.719,53.4 15.9,53.4 13,53.4 12.7,53.1 ; 12.7,53.1 12.7,53.1 ; 34.359,29.157 34.359,32.158 35.059,32.858 37.86,32.858 38.61,32.108 38.61,16.554 39.71,15.454 39.71,13.503 38.91,12.703 36.109,12.703 35.259,13.553 35.259,28.257 34.359,29.157
  lines w0.559: 20.5,45.5 20.4,45.6 20.4,48.6 22.2,50.4 44.699,50.4 48.4,54.101 48.4,61.8 64.7,61.8 66.5,63.6 66.5,73.4 65.4,74.5 63.1,74.5 61.7,73.1 61.7,65.8 60.4,64.5 54,64.5 52.9,65.6 52.9,73.1 51.5,74.5 48.5,74.5 47.4,73.4 47.4,71.4 47.4,54.902 44.111,51.613 22.506,51.613
  lines w1.016: 75.069,34.009 75.069,0.35 75.169,0.25 75.819,0.25 75.819,33.759 76.019,33.959 ; 75.819,0.775 75.819,34.059

## Silkscreen, mask and mechanical layers (free items; w line width, h text height)
Top Overlay:
  drawing of 1190 lines, arcs and shapes, not listed
  text "AC" at 0.65,96.424 h0.8
  text "12V" at 15.754,55.314 h0.8
  text "PROG." at 71.218,47.312 h0.8
  text "5V" at 30.758,17.054 h0.8
  text "SENSOR" at 67.367,6.952 h0.6 r90
  text "WiFi_sec._det._v01" at 59.015,1.584 h0.8
  text "WiFi_sec._det._v01" at 87.322,1.534 h0.8
Bottom Overlay:
  circle w0.2: c79.4,29.9 r1.476
  lines w0.05: 94.724,10.603 94.324,11.003 ; 96.024,11.003 94.324,11.003 ; 99.9,9.877 100.075,10.053 100.25,10.228 100.25,12.028 99.875,12.403 96.524,12.403 96.274,12.153 96.274,10.003 96.424,9.852 99.875,9.852 99.988,9.965 ; 94.324,11.003 94.724,11.403 94.324,11.003
  text "TP_GND" at 80.65,31.933 h0.5
  text "MAIN" at 80.32,1.6 h0.8
Top Solder:
  region: 72,33.6 cw(c72,31.6) 74,31.6 cw(c72,31.6) 72,29.6 71.9,29.6 cw(c71.9,31.6) 69.9,31.6 cw(c71.9,31.6) 71.9,33.6
Bottom Solder:
  region: 77.9,29.9 79.45,31.45 80.95,29.95 79.4,28.4
Drill Guide:
  the board outline again, w0.1
Route Tool Path:
  lines w0.5: 75.244,31.526 75.244,34 ; 75.246,29.358 75.246,29.458 ; 75.246,30.058 75.246,30.158 ; 75.246,30.758 75.246,30.858 ; 75.247,9.819 75.247,12.293 ; 75.249,20.76 75.249,23.233 ; 75.249,26.181 75.249,28.655 ; 75.249,7.651 75.249,7.751 ; 75.249,8.351 75.249,8.451 ; 75.249,9.051 75.249,9.151 ; 75.251,18.591 75.251,18.691 ; 75.251,19.291 75.251,19.391 ; 75.251,19.991 75.251,20.091 ; 75.251,24.013 75.251,24.113 ; 75.251,24.713 75.251,24.813 ; 75.251,25.413 75.251,25.513 ; 75.253,4.403 75.253,6.876 ; 75.254,15.343 75.254,17.817 ; 75.255,-0.445 75.255,2.234 75.255,2.334 ; 75.255,2.934 75.255,3.034 ; 75.255,3.634 75.255,3.734 ; 75.256,13.175 75.256,13.275 ; 75.256,13.875 75.256,13.975 ; 75.256,14.575 75.256,14.675
  lines w1: 0,27.7 0,11.7 -0.555,11.145 -0.555,10.355 -0.5,10.3 -0.5,-0.6 102.5,-0.6 102.6,-0.5 102.6,34.5 75.6,34.5 ; 0.7,10.4 0.7,10.8 0.8,10.9 0.8,9.7 ; 1,100 -0.5,100 -0.5,9.5 3.5,9.5 3.5,11.2 3.5,26.2 ; 1.6,9.8 1.6,25.9 1.8,26.1 1.8,10.4 2.1,10.1 2.1,25.8 2.4,26.1 2.4,10.1 2.6,9.9 2.6,26.1 ; 3.3,9.5 5.6,9.5 5.6,11.4 5.6,26.2 ; 4.2,26.2 4.2,9.7 4.3,9.6 ; 5,10 5,26.1 ; 75,34.4 75,100 0,100 0,26.2 3.5,26.2 ; 3.5,26.2 5.6,26.2 ; 5.6,26.2 5.6,26.2 ; -0.1,10.3 0.9,11.3 0.9,26.2 -0.1,25.2 -0.1,10.3

## Text inside footprints (layer, text, board x,y; h text height)
BR1: Top Overlay "~" at 34.116,53.649 h1.52 r90; Top Overlay "~" at 34.016,48.549 h1.52 r90
J6: Top Overlay "1" at 67.217,17.154 h0.5 r90
J8: Bottom Overlay "1" at 77.57,17.153 h0.5 r270
S1: Top Overlay "G" at 87.496,29.604 h1; Top Overlay "D" at 88.896,24.804 h1; Top Overlay "D" at 88.896,24.804 h1; Top Overlay "S" at 91.296,27.504 h1
T1: Top Overlay "INPUT" at 13.253,86.322 h1; Top Overlay "OUTPUT" at 40.554,56.154 h1